# Altium PCB PCB.PcbDoc
Units mil, origin at the board's own origin, x right, y up, seen from the top; angles counter-clockwise.
Board outline 1725 x 1450 mil, 2 copper layers (Top Layer, Bottom Layer); 20 components, 21 nets, 103 pads, 11 vias.
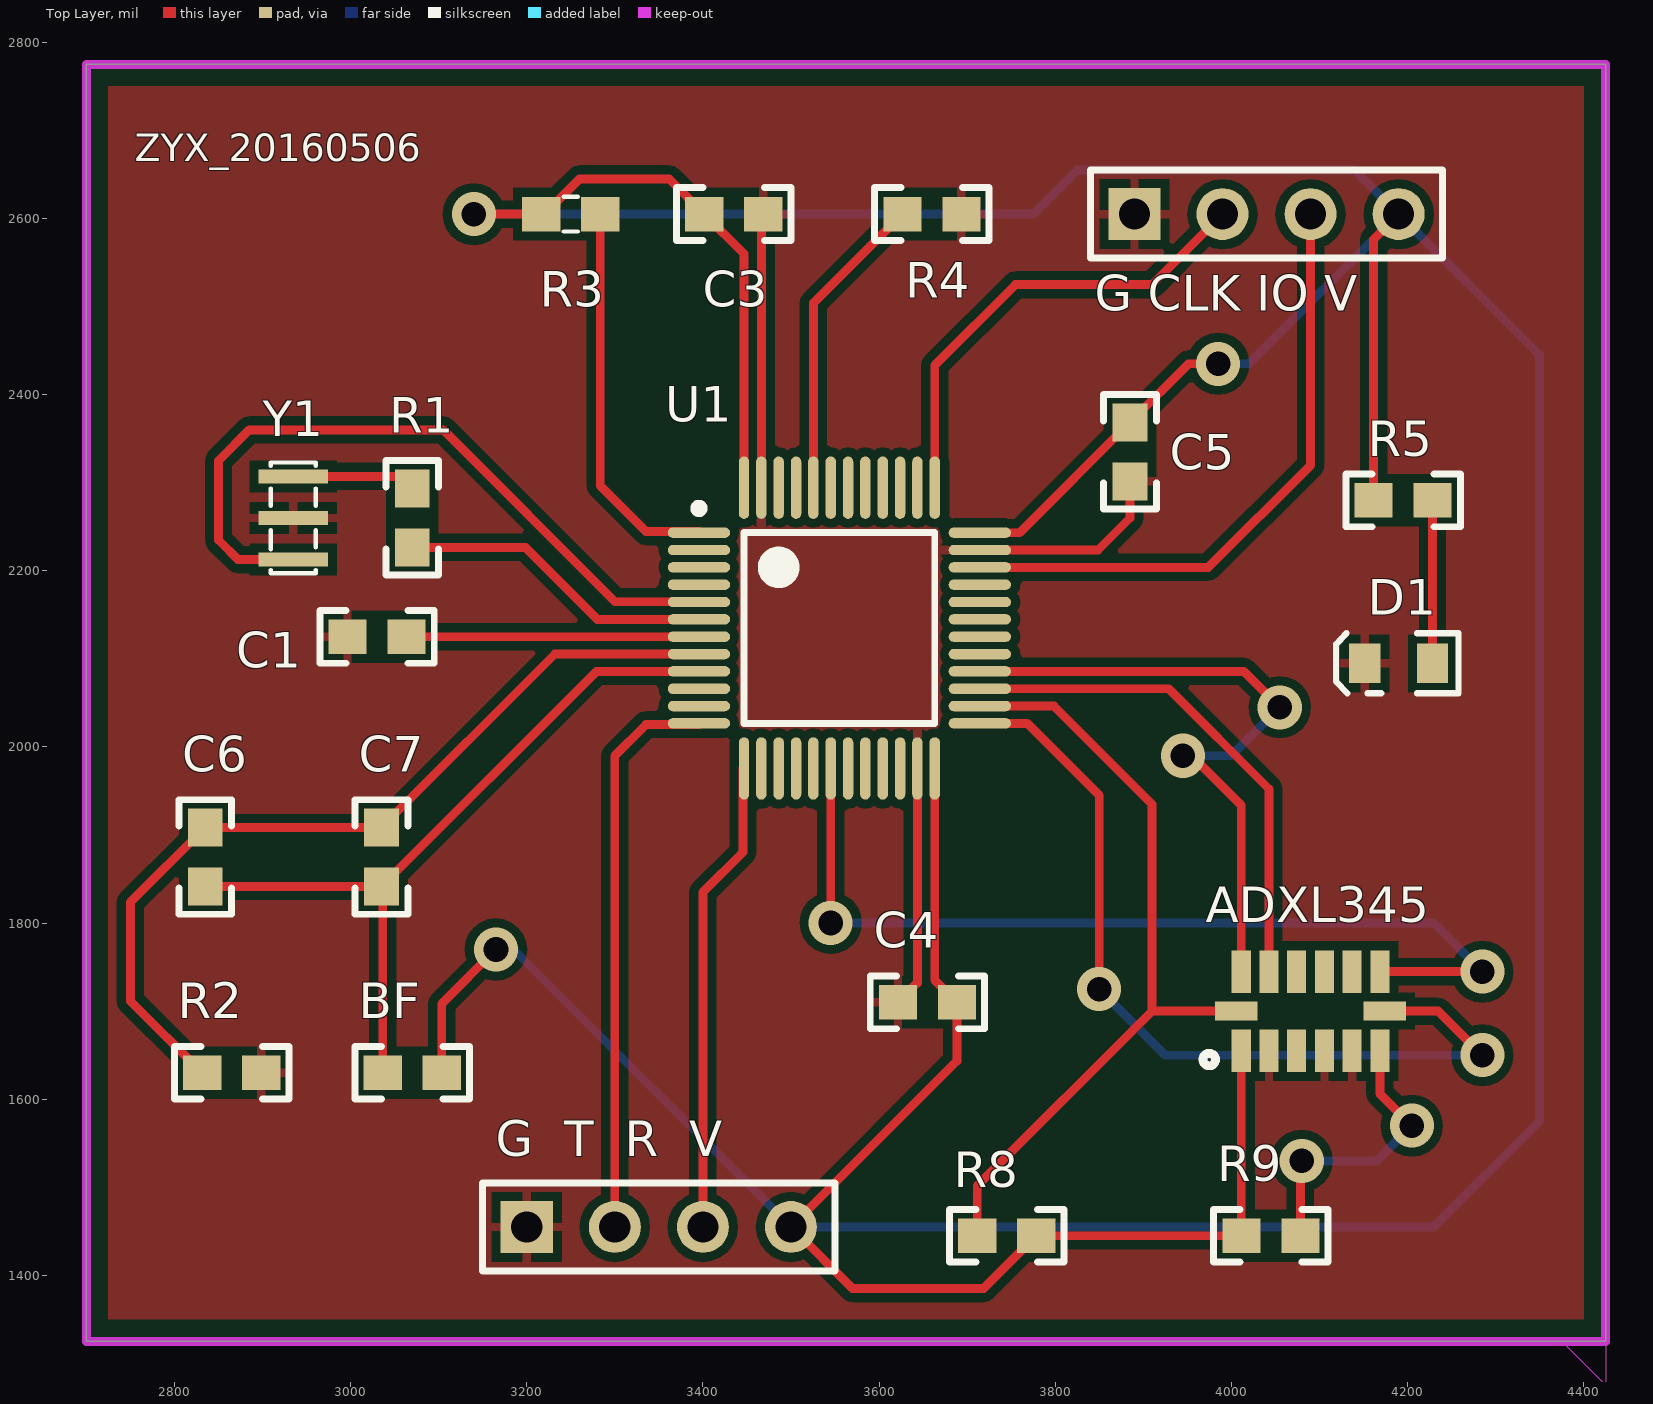
[diagram p0: Top Layer view]
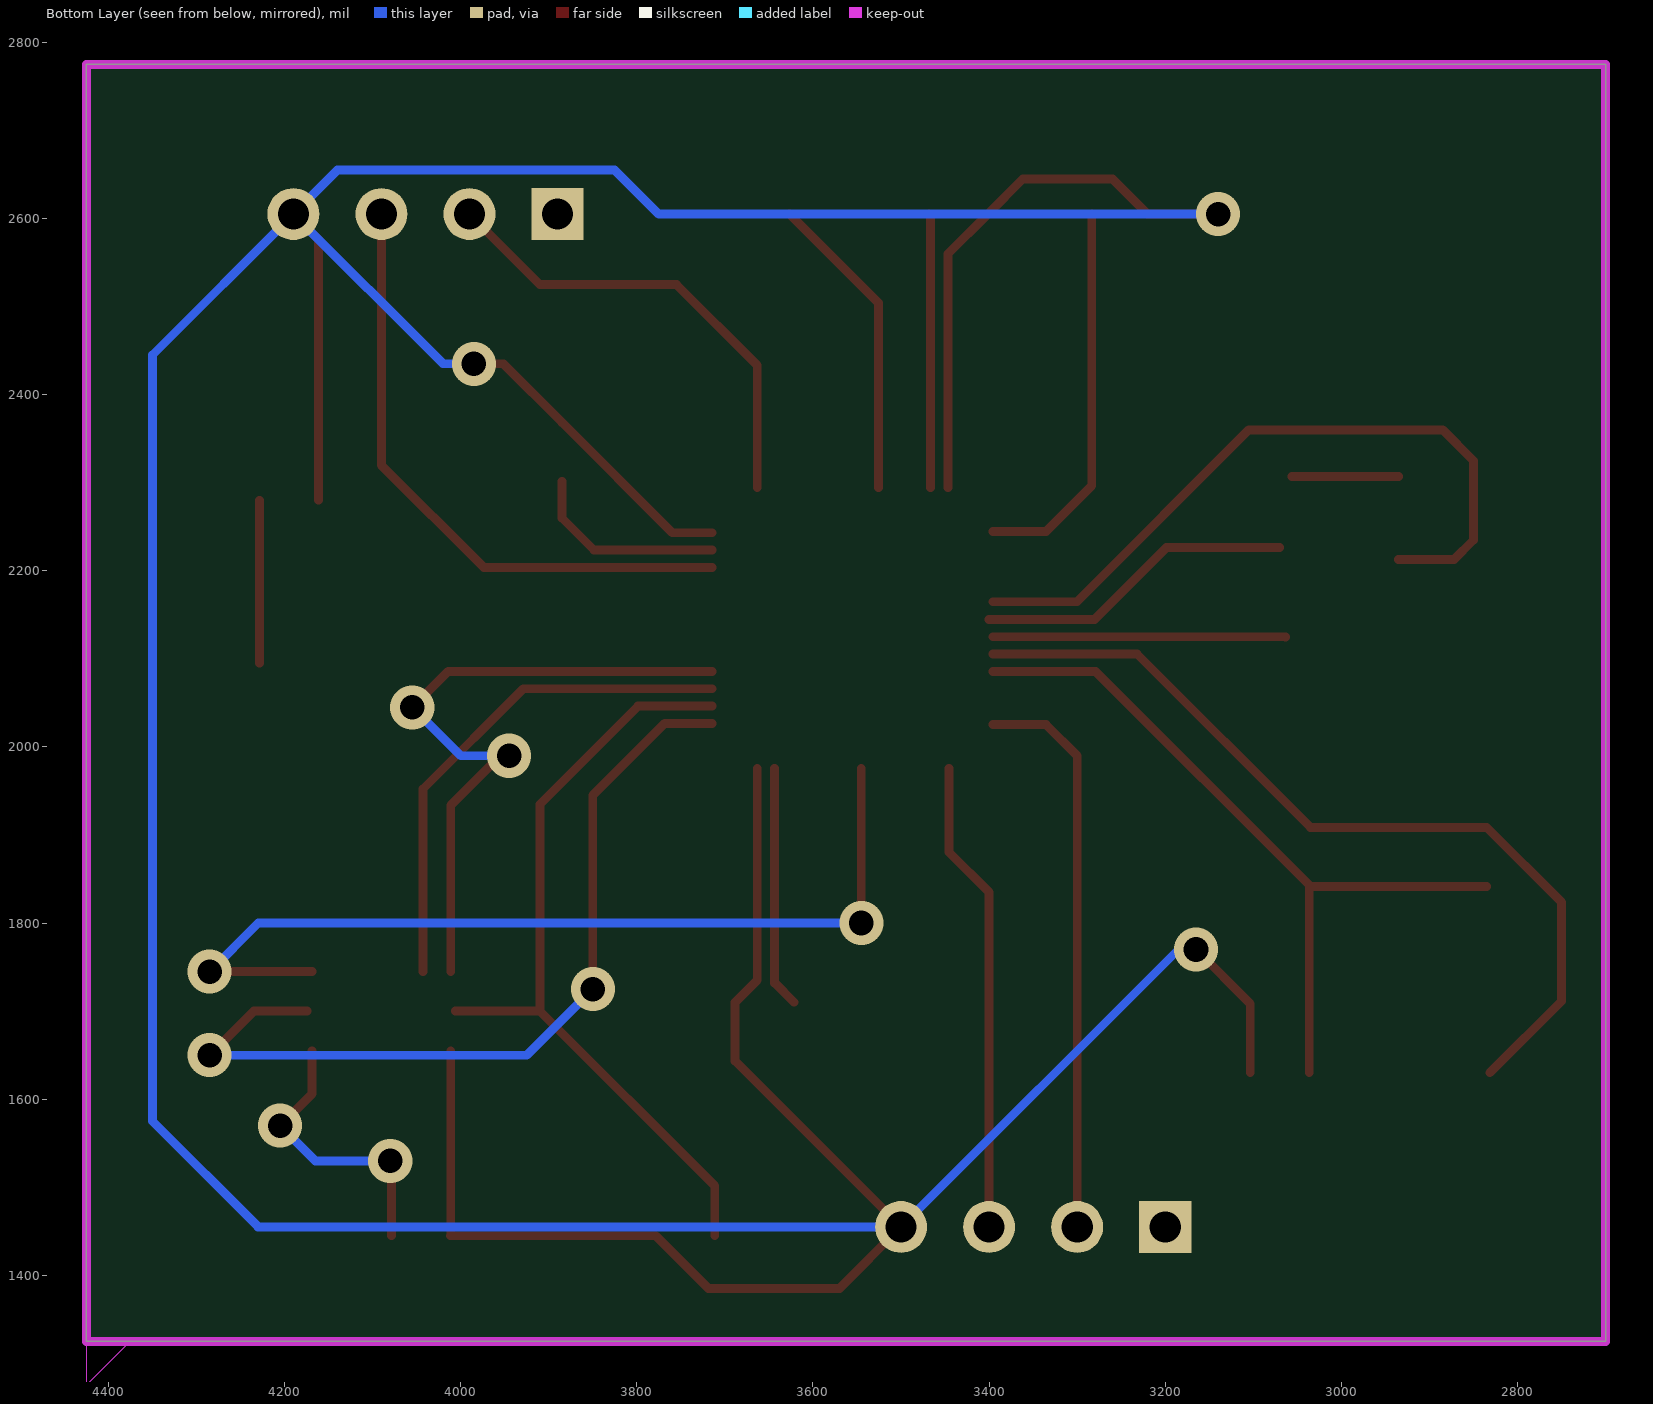
[diagram p1: Bottom Layer view, seen from below]

## Layer stack, top to bottom
Top Layer: signal copper 1.4
Dielectric: dielectric 12.6, FR-4, Dk 4.8
Bottom Layer: signal copper 1.4

## Board outline
2700,1325 2700,2775 4425,2775 4425,1325
cut-out: 4375,1325 4425,1325 4425,1275

## Design rules (kind name [scope] priority, off if disabled: settings)
Clearance [All] p1: gap=10
PolygonConnect [All] p1: connectstyle=Relief reliefconductorwidth=10 reliefentries=4 polygonreliefangle="90 Angle" airgapwidth=10
RoutingVias [All] p1: holewidth=28 width=50 viastyle="Through Hole" minholewidth=28 minwidth=50 maxholewidth=28 maxwidth=50
SolderMaskExpansion [All] p1: expansion=4
Width [All] p1: maxlimit=10 minlimit=10 preferedwidth=10
28 further rules are at their usual default settings.

## Components (designator, comment, footprint, x,y, rotation, side; value= is the part's Value field where it differs from the comment)
ADXL345 "ADXL345" ADXL345 4090,1700 r90 top
BF "BF" R1608[0603] 3070,1630 r0 top
C1 "cap smd" C1608[0603]N 3030,2125 r0 top
C3 "cap smd" C1608[0603]N 3435,2605 r0 top
C4 "cap smd" C1608[0603]N 3655,1710 r180 top
C5 "cap smd" C1608[0603]N 3885,2335 r270 top
C6 "cap smd" C1608[0603]N 2835,1875 r90 top
C7 "cap smd" C1608[0603]N 3035,1875 r90 top
D1 "LED" D1608[0603] 4190,2095 r180 top
"G  T  R  V" "Header 4" HDR1X4 3200,1455 r0 top (schematic designator USART2)
"G CLK IO V" "Header 4" HDR1X4 3890,2605 r0 top (schematic designator SWD)
R1 "RES1" R1608[0603] 3070,2260 r270 top
R2 "RES1" R1608[0603] 2865,1630 r0 top
R3 "RES1" 1608[0603] 3250,2605 r0 top
R4 "RES1" R1608[0603] 3660,2605 r180 top
R5 "RES1" R1608[0603] 4195,2280 r180 top
R8 "RES1" R1608[0603] 3745,1445 r0 top
R9 "RES1" R1608[0603] 4045,1445 r0 top
U1 "STM32F103C8T6" LQFP48_N 3555,2135 r0 top
Y1 "CSTCE8M00G52" Crystal_C 2935,2260 r90 top

## Footprints (in the part's own frame and the unit in brackets; to place one, negate y for a bottom-side part, rotate by r counter-clockwise, add the part's x,y. Pads: shape width x height; smd on the part's side, far side on the other; paste and mask are expansions set on the pad)
1608[0603] [mm] "Chip Capacitor; Body 1.6 x 0.8 mm (LxW typ)"
  rect 1.1x1 smd: 1(-0.85,0) 2(0.85,0)
  silkscreen extent -0.2,-0.5 0.2,0.5
ADXL345 [mm]
  rect 1.23x0.55 smd: 1(-1.14,2) 2(-1.14,1.2) 3(-1.14,0.4) 4(-1.14,-0.4) 5(-1.14,-1.2) 6(-1.14,-2) 8(1.14,-2) 9(1.14,-1.2) 10(1.14,-0.4) 11(1.14,0.4) 12(1.14,1.2) 13(1.14,2)
  rect 0.55x1.23 smd: 7(0,-2.14) 14(0,2.14)
  silkscreen extent -1.58,2.74 -1.22,3.1
C1608[0603]N [mm] "Chip Capacitor; Body 1.6 x 0.8 mm (LxW typ)"
  rect 1.1x1 smd: 1(-0.85,0) 2(0.85,0)
  silkscreen extent -1.65,-0.76 1.65,0.76, body extent -0.8,-0.4 0.8,0.4, height 0.8
Crystal_C [mm] "含电容晶振，村田 3.2X1.3mm"
  rect 0.4x2 smd: 1(-1.2,0) 2(0,0) 3(1.2,0)
  silkscreen extent -1.6,-0.65 1.6,0.65
D1608[0603] [mm]
  rect 0.9x1.15 smd: 1(-0.98,0) 2(0.98,0)
  silkscreen extent -1.73,-0.86 1.8,0.86, body extent -0.8,-0.4 0.8,0.4, height 0.8
HDR1X4 [mm] "Connector; Header; 4 Position"
  rect 1.5x1.5 hole 0.9: 1(0,0)
  round 1.5 hole 0.9: 2(2.54,0) 3(5.08,0) 4(7.62,0)
  silkscreen extent -1.27,-1.27 8.89,1.27
LQFP48_N [mm] "Thin QFP, 48-Leads, Body 7x7mm, Pitch 0.5mm, IPC Medium Density"
  oval 1.8x0.3 smd: 1(-4.05,2.75) 2(-4.05,2.25) 3(-4.05,1.75) 4(-4.05,1.25) 5(-4.05,0.75) 6(-4.05,0.25) 7(-4.05,-0.25) 8(-4.05,-0.75) 9(-4.05,-1.25) 10(-4.05,-1.75) 11(-4.05,-2.25) 12(-4.05,-2.75) 25(4.05,-2.75) 26(4.05,-2.25) 27(4.05,-1.75) 28(4.05,-1.25) 29(4.05,-0.75) 30(4.05,-0.25) 31(4.05,0.25) 32(4.05,0.75) 33(4.05,1.25) 34(4.05,1.75) 35(4.05,2.25) 36(4.05,2.75)
  oval 0.3x1.8 smd: 13(-2.75,-4.05) 14(-2.25,-4.05) 15(-1.75,-4.05) 16(-1.25,-4.05) 17(-0.75,-4.05) 18(-0.25,-4.05) 19(0.25,-4.05) 20(0.75,-4.05) 21(1.25,-4.05) 22(1.75,-4.05) 23(2.25,-4.05) 24(2.75,-4.05) 37(2.75,4.05) 38(2.25,4.05) 39(1.75,4.05) 40(1.25,4.05) 41(0.75,4.05) 42(0.25,4.05) 43(-0.25,4.05) 44(-0.75,4.05) 45(-1.25,4.05) 46(-1.75,4.05) 47(-2.25,4.05) 48(-2.75,4.05)
  silkscreen extent -4.17,-2.75 2.75,3.57, body extent -3.5,-3.5 3.5,3.5, height 1.6
R1608[0603] [mm] "Chip Capacitor; Body 1.6 x 0.8 mm (LxW typ)"
  rect 1.1x1 smd: 1(-0.85,0) 2(0.85,0)
  silkscreen extent -1.65,-0.76 1.65,0.76, body extent -0.8,-0.4 0.8,0.4, height 0.5

## Part data
BF: "磁珠"
C1 C3 C4 C5 C6 C7: library part CAP, "贴片无极性电容"
D1: "蓝色 LED"
"G  T  R  V" "G CLK IO V": "Header, 4-Pin"
U1: "STM32 ARM-based 32-bit MCU Performance Line with 64 kB Flash, 20 kB Internal RAM, -40 to +85癈 Temperature, 48-Pin LQFP, Tray"
Y1: library part CRYSTAL_C, "Crystal_8M"

## Via types
v1: diameter 50, hole 28, Top Layer to Bottom Layer, 11 vias

## Nets (pads, with @x,y where several pads share a name; then routed paths per layer and width w, separated by ;. In a path a pad name is that pad's centre, name@x,y a point inside that pad or via, vN(x,y) a via of type N, cw(c..) or ccw(c..) an arc to the next point about the centre after c; other vN are vias at no path point)
AGND: C6.2 C7.2 R2.1 U1.8 | length 989.6
  Top Layer w10: R2.1 2750,1711.54 2750,1823.46 C6.2 C7.2 3232.01,2105.47 U1.8
BOOT0: R4.2 U1.44 | length 352.4
  Top Layer w10: U1.44 3525.47,2503.94 R4.2
GND: "G  T  R  V.1" "G CLK IO V.1" ADXL345.2 ADXL345.4 ADXL345.5 C1.1 C3.2 C4.2 C5.2 D1.2 R2.2 R4.1 U1.23 U1.35 U1.47 Y1.2 | length 813.3
  Top Layer w10: U1.47 3466.42,2602.95 C3.2 ; C4.2 3643.58,1732.05 U1.23 ; U1.35 3848.58,2223.58 3885,2260 C5.2
IRQ0: ADXL345.8 U1.18 | length 1054.4
  Top Layer w10: v1(3545.16,1800.16) U1.18 ; ADXL345.8 v1(4285,1744.88)
  Bottom Layer w10: v1(3545.16,1800.16) 4229.72,1800.16 v1(4285,1744.88)
NetADXL345_6: ADXL345.6 R9.2 | length 327.3
  Top Layer w10: R9.2 4078.46,1528.46 v1(4080,1530) ; ADXL345.6 4168.74,1606.26 v1(4205,1570)
  Bottom Layer w10: v1(4080,1530) 4165,1530 v1(4205,1570)
NetD1_1: D1.1 R5.1 | length 185
  Top Layer w10: R5.1 4228.46,2095.12 D1.1
NetR1_1: R1.1 Y1.3 | length 121.2
  Top Layer w10: Y1.3 R1.1@3056.22,2307.24
NetR3_2: R3.2 U1.1 | length 442.1
  Top Layer w10: R3.2 3283.46,2296.54 3335.51,2244.49 U1.1@3395.55,2244.49
NRST: C1.2 U1.7 | length 332.2
  Top Layer w10: C1.2 C1.2@3063.62,2124.84 ; C1.2@3063.62,2125.16 U1.7
OSC_IN: U1.5 Y1.1 | length 825.1
  Top Layer w10: Y1.1 2872.24,2212.76 2850,2235 2850,2325 2885,2360 3105,2360 3300.16,2164.84 U1.5@3395.55,2164.84
OSC_OUT: R1.2 U1.6 | length 364
  Top Layer w10: R1.2 3198.46,2226.54 3280.16,2144.84 U1.6@3400.16,2144.84
SPI2_MISO: ADXL345.12 U1.27 | length 582.8
  Top Layer w10: U1.27 3775,2066.1 3928.9,2066.1 4042.76,1952.24 ADXL345.12
SPI2_MOSI: ADXL345.13 U1.28 | length 775.7
  Top Layer w10: U1.28 4014.21,2085.79 v1(4055,2045) ; v1@3940,1995 v1(3945,1990) 3955,1990 4011.26,1933.74 ADXL345.13
  Bottom Layer w10: v1(3945,1990) 4000,1990 v1(4055,2045)
SPI2_NSS: ADXL345.7 U1.25 | length 986.9
  Top Layer w10: U1.25 3768.27,2026.73 3850,1945 v1(3850,1725) ; ADXL345.7 4235,1700 v1(4285,1650)
  Bottom Layer w10: v1(3850,1725) 3925,1650 v1(4285,1650)
SPI2_SCK: ADXL345.14 R8.1 U1.26 | length 909.7
  Top Layer w10: R8.1 3711.54,1501.54 3910,1700 ; U1.26 3798.58,2046.42 3910,1935 3910,1700 ; ADXL345.14 3910,1700
SWCLK: "G CLK IO V.2" U1.37 | length 536.7
  Top Layer w10: U1.37 3663.27,2433.27 3755,2525 3910,2525 3990,2605
SWDIO: "G CLK IO V.3" U1.34 | length 708.6
  Top Layer w10: U1.34 3973.9,2203.9 4090,2320 4090,2605
USART2_RX: "G  T  R  V.3" U1.13 | length 539.4
  Top Layer w10: 3400,1455 3400,1835 3445.51,1880.51 U1.13@3445.51,1975.55
USART2_TX: "G  T  R  V.2" U1.12 | length 645.3
  Top Layer w10: 3300,1455 3300,1990 3335.51,2025.51 U1.12@3395.55,2025.51
VDD: "G  T  R  V.4" "G CLK IO V.4" ADXL345.1 BF.2 C3.1 C4.1 C5.1 R3.1 R5.2 R8.2 R9.1 U1.24 U1.36 U1.48 | length 6688.8
  Top Layer w10: BF.2 3103.46,1708.46 v1(3165,1770) ; v1(3140,2605) R3.1 3220,2605 3260,2645 3361.54,2645 C3.1 3446.73,2559.8 U1.48 ; U1.24 3663.27,1735.2 C4.1 3688.46,1643.46 3500,1455 3570,1385 3718.46,1385 R8.2 R9.1 ; U1.36 3759.8,2243.27 C5.1 3951.54,2435 v1(3985,2435) ; R9.1@4011.26,1445.28 ADXL345.1 ; R5.2 4161.54,2576.54 4190,2605
  Bottom Layer w10: v1(3140,2605) 3775,2605 3825,2655 4140,2655 4190,2605 ; v1(3165,1770) 3185,1770 3500,1455 4230,1455 4350,1575 4350,2445 4190,2605 ; v1(3985,2435) 4020,2435 4190,2605
VDDA: BF.1 C6.1 C7.1 U1.9 | length 872.8
  Top Layer w10: C6.1 C7.1 ; BF.1 3036.54,1840 C7.1 ; 3278.46,2085 C7.1 ; 3279.25,2085.79 U1.9
pads on no net: ADXL345.3 ADXL345.9 ADXL345.10 ADXL345.11 U1.2 U1.3 U1.4 U1.10 U1.11 U1.14 U1.15 U1.16 U1.17 U1.19 U1.20 U1.21 U1.22 U1.29 U1.30 U1.31 U1.32 U1.33 U1.38 U1.39 U1.40 U1.41 U1.42 U1.43 U1.45 U1.46

## Polygon pours and split planes (outlines as drawn)
GND on Top Layer "Solder Side-No Net" (solid, remove dead copper, pour order 4): 2725,2750 2725,1350 4400,1350 4400,2750 2725,2750

## Keep-outs
Keep-Out Layer:
  the board outline again, w10

## Silkscreen, mask and mechanical layers (free items; w line width, h text height)
Top Overlay:
  text "ZYX_20160506" at 2755,2665 h31.5